# EAGLE board two-layer (EAGLE 5.07), part 1 of 2
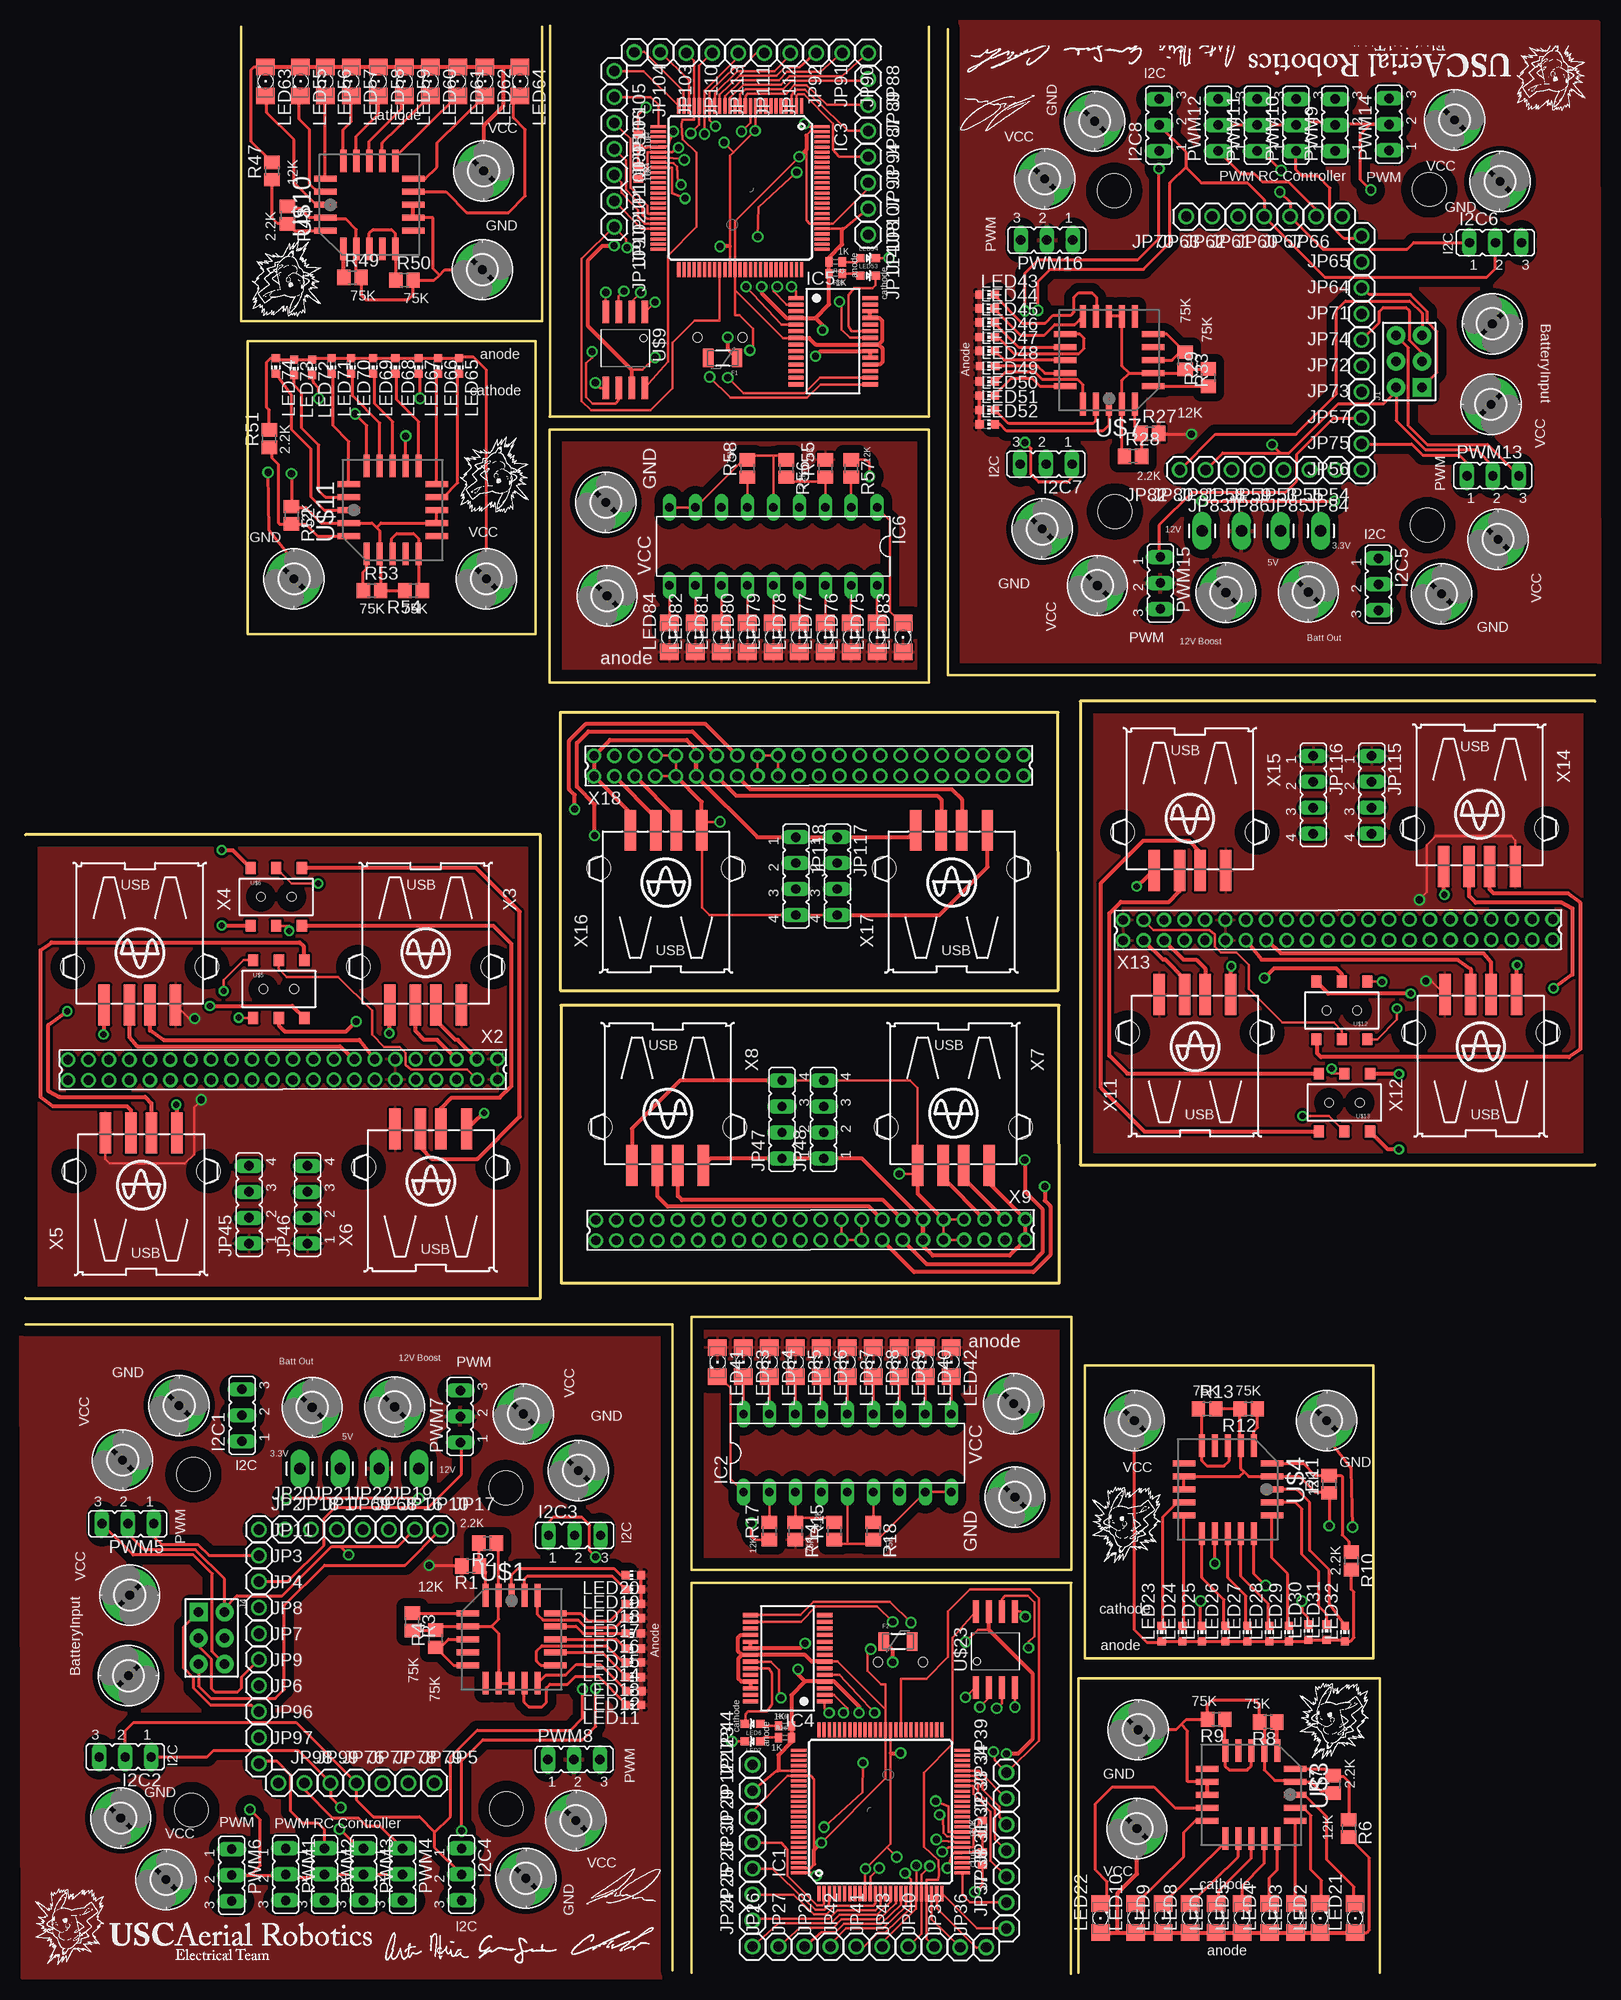
[diagram p0: board, top side]
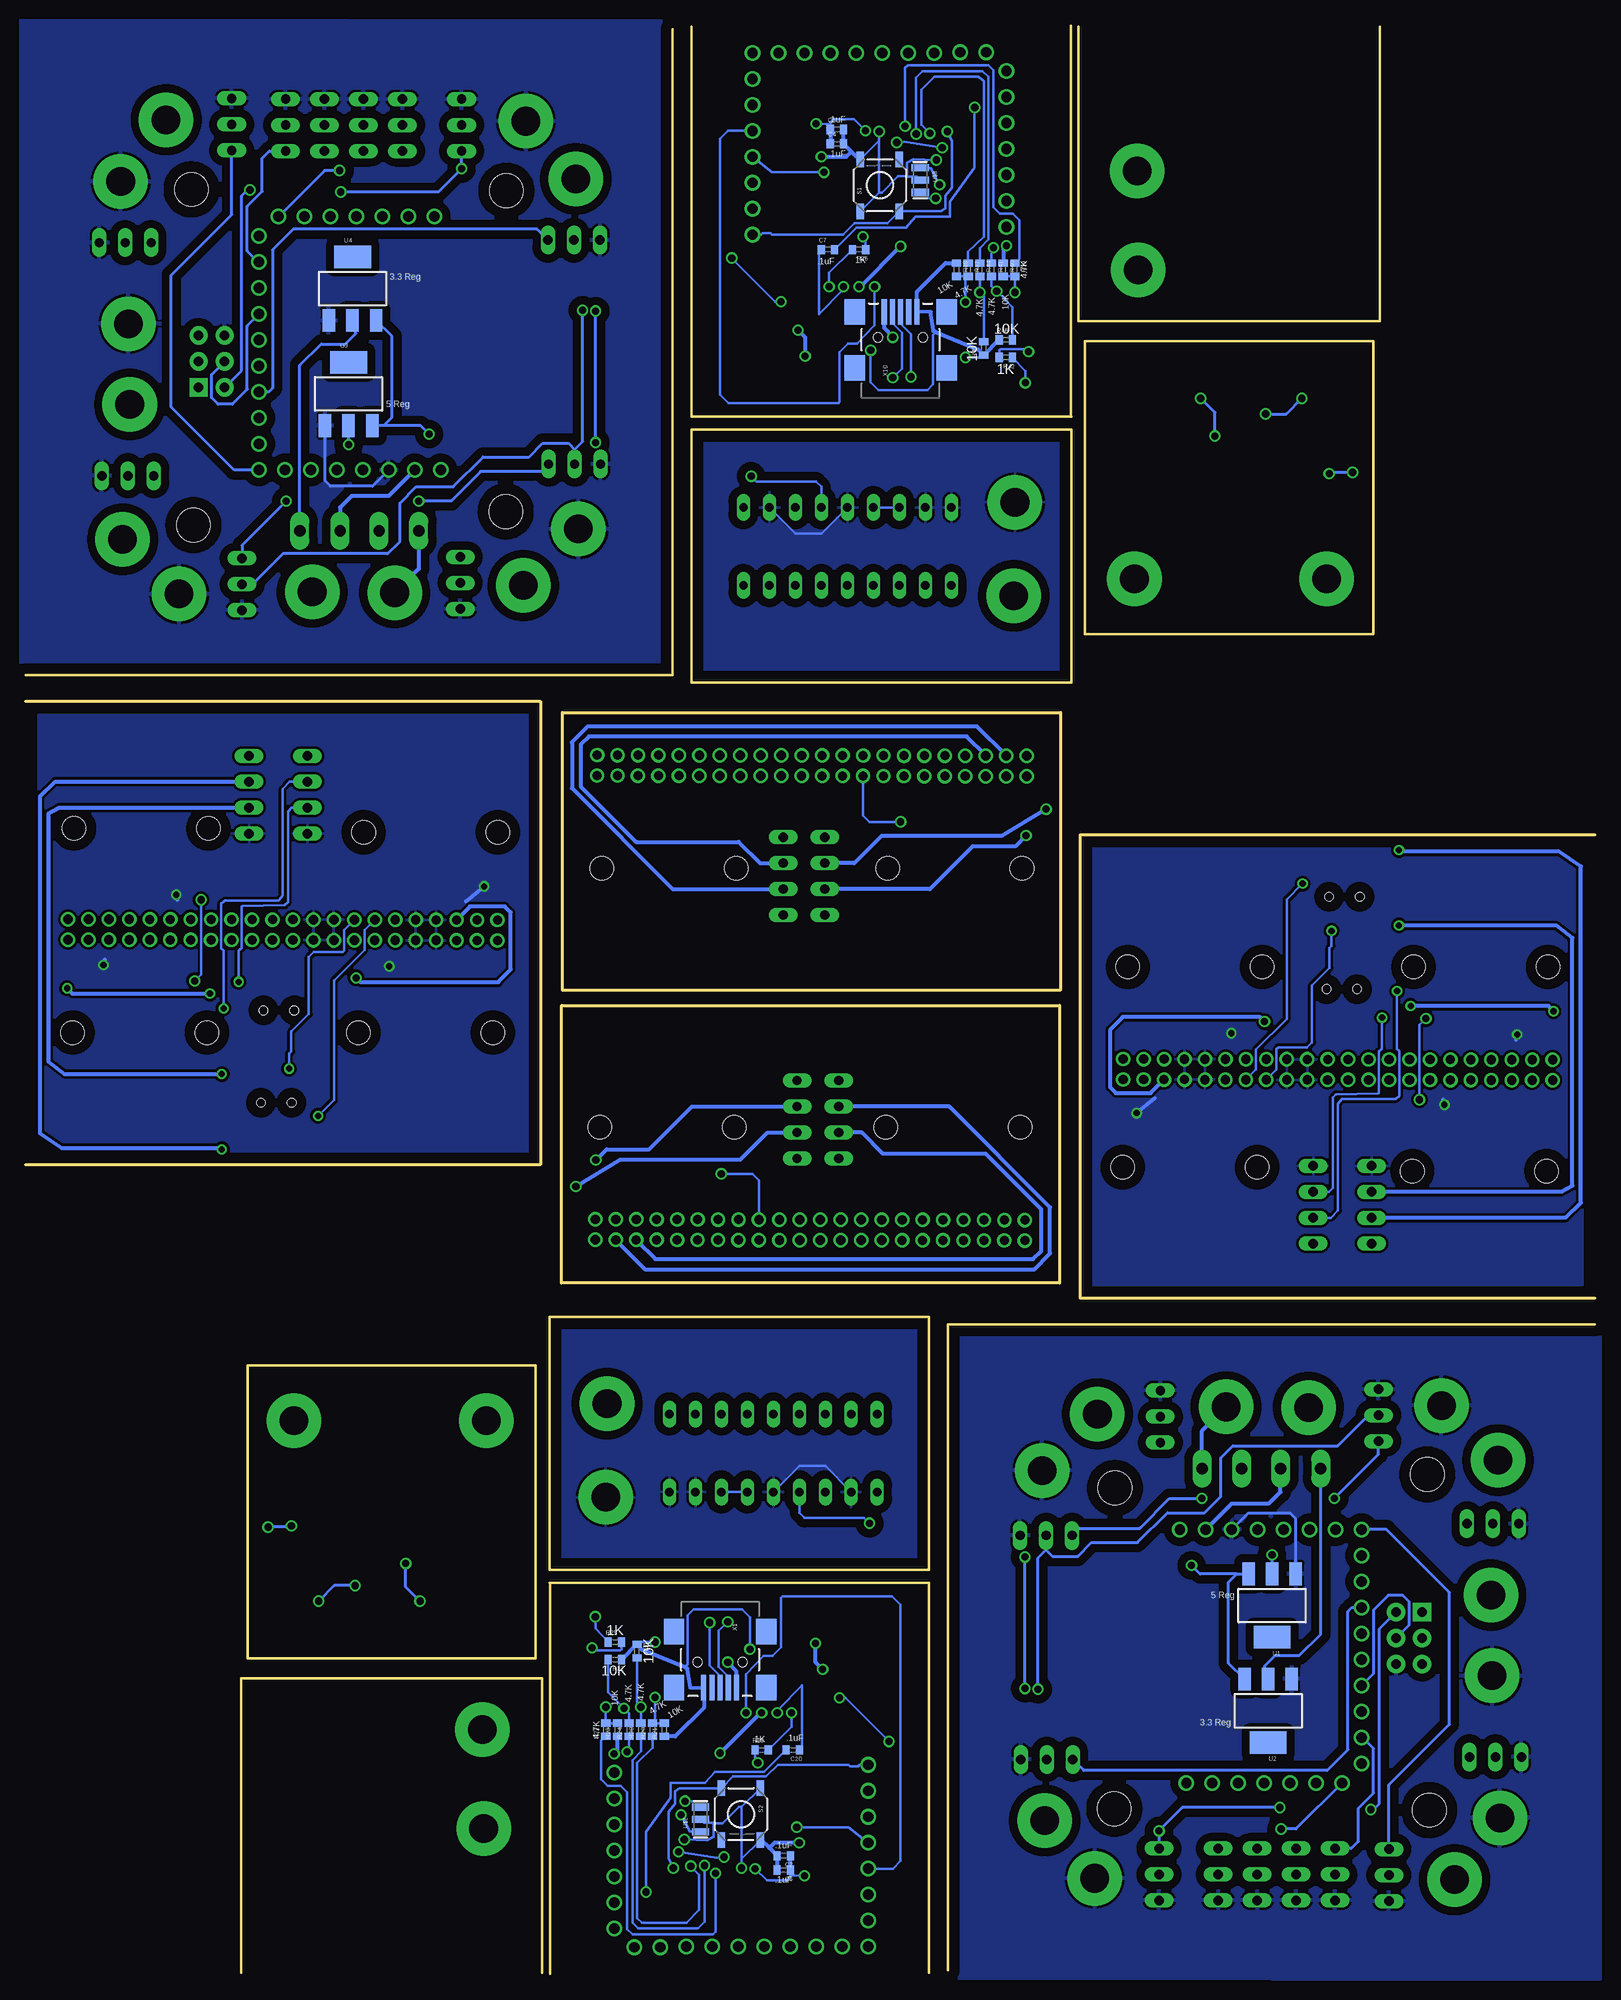
[diagram p1: board, bottom side, seen from below]

Size 153.47 x 190.5 mm. Coordinates in mm from the lower left corner, seen from the top.
Outline: 63.27,0.34 63.27,63.52 0.03,63.52
Outline: 132.4,0.13 132.4,28.88 102.96,28.88 102.96,0.13
Outline: 65.11,38.23 102.25,38.23
Outline: 65.11,38.09 65.11,0.13
Outline: 102.2,38.22 102.2,0
Outline: 0,66.06 50.34,66.06 50.34,111.39 0,111.39
Outline: 90.2,190.16 90.2,126.97 153.44,126.97
Outline: 21.06,190.37 21.06,161.62 50.51,161.62 50.51,190.37
Outline: 88.35,152.27 51.22,152.27
Outline: 88.35,152.41 88.35,190.37
Outline: 51.27,152.28 51.27,190.5
Outline: 153.47,124.44 103.12,124.44 103.12,79.11 153.47,79.11
Outline: 103.59,30.86 131.77,30.86 131.77,59.49 103.59,59.49 103.59,30.86
Outline: 65.11,39.5 102.25,39.5 102.25,64.25 65.11,64.25 65.11,39.5
Outline: 49.87,159.64 21.7,159.64 21.7,131.01 49.87,131.01 49.87,159.64
Outline: 88.35,151 51.22,151 51.22,126.25 88.35,126.25 88.35,151
Outline: 100.96,123.34 52.27,123.34 52.29,96.17 100.98,96.17 100.96,123.34
Outline: 52.37,67.54 101.07,67.54 101.05,94.71 52.36,94.71 52.37,67.54
Copper layers (1*16): Top 0.035mm / dielectric 1.5mm / Bottom 0.035mm
Design rules "default": minimum track width 10mil, minimum drill 24mil, track to track 8mil, track to pad 8mil, pad to pad 8mil, via to via 8mil, smd to smd 8mil, copper to edge 40mil, drill to drill 8mil, minimum pad ring 10mil, minimum via ring 8mil, stop-mask expansion 4mil, vias tented up to drill 0mil, thermal gap 10mil

## Footprints (pad centres in the part's own frame; a part is rotated, then mirrored left to right if it is on the bottom)
C0402 = smd 0.7 x 0.9: 1 -0.65,0; 2 0.65,0
PTC-1206 = smd 1 x 1.8: 1 -1.4,0; 2 1.4,0
2,8-PAD = drill 2.8 pad 5.334 round: B2,8 0,0
JP2 = drill 0.914 long: 1 -2.54,0; 2 0,0; 3 2.54,0
TQFP100 = smd 1.5 x 0.3: 1 -8,6; 2 -8,5.5; 3 -8,5; 4 -8,4.5; 5 -8,4; 6 -8,3.5; 7 -8,3; 8 -8,2.5; 9 -8,2; 10 -8,1.5; 11 -8,1; 12 -8,0.5; 13 -8,0; 14 -8,-0.5; 15 -8,-1; 16 -8,-1.5; 17 -8,-2; 18 -8,-2.5; 19 -8,-3; 20 -8,-3.5; 21 -8,-4; 22 -8,-4.5; 23 -8,-5; 24 -8,-5.5; 25 -8,-6; 51 8,-6; 52 8,-5.5; 53 8,-5; 54 8,-4.5; 55 8,-4; 56 8,-3.5; 57 8,-3; 58 8,-2.5; 59 8,-2; 60 8,-1.5; 61 8,-1; 62 8,-0.5; 63 8,0; 64 8,0.5; 65 8,1; 66 8,1.5; 67 8,2; 68 8,2.5; 69 8,3; 70 8,3.5; 71 8,4; 72 8,4.5; 73 8,5; 74 8,5.5; 75 8,6 | smd 0.3 x 1.5: 26 -6,-8; 27 -5.5,-8; 28 -5,-8; 29 -4.5,-8; 30 -4,-8; 31 -3.5,-8; 32 -3,-8; 33 -2.5,-8; 34 -2,-8; 35 -1.5,-8; 36 -1,-8; 37 -0.5,-8; 38 0,-8; 39 0.5,-8; 40 1,-8; 41 1.5,-8; 42 2,-8; 43 2.5,-8; 44 3,-8; 45 3.5,-8; 46 4,-8; 47 4.5,-8; 48 5,-8; 49 5.5,-8; 50 6,-8; 76 6,8; 77 5.5,8; 78 5,8; 79 4.5,8; 80 4,8; 81 3.5,8; 82 3,8; 83 2.5,8; 84 2,8; 85 1.5,8; 86 1,8; 87 0.5,8; 88 0,8; 89 -0.5,8; 90 -1,8; 91 -1.5,8; 92 -2,8; 93 -2.5,8; 94 -3,8; 95 -3.5,8; 96 -4,8; 97 -4.5,8; 98 -5,8; 99 -5.5,8; 100 -6,8
DIL18 = drill 0.813 long: 1 -10.16,-3.81; 2 -7.62,-3.81; 3 -5.08,-3.81; 4 -2.54,-3.81; 5 0,-3.81; 6 2.54,-3.81; 7 5.08,-3.81; 8 7.62,-3.81; 9 10.16,-3.81; 10 10.16,3.81; 11 7.62,3.81; 12 5.08,3.81; 13 2.54,3.81; 14 0,3.81; 15 -2.54,3.81; 16 -5.08,3.81; 17 -7.62,3.81; 18 -10.16,3.81
SSOP28 = smd 0.4 x 1.5: 1 -4.225,-3.625; 2 -3.575,-3.625; 3 -2.925,-3.625; 4 -2.275,-3.625; 5 -1.625,-3.625; 6 -0.975,-3.625; 7 -0.325,-3.625; 8 0.325,-3.625; 9 0.975,-3.625; 10 1.625,-3.625; 11 2.275,-3.625; 12 2.925,-3.625; 13 3.575,-3.625; 14 4.225,-3.625; 15 4.225,3.625; 16 3.575,3.625; 17 2.925,3.625; 18 2.275,3.625; 19 1.625,3.625; 20 0.975,3.625; 21 0.325,3.625; 22 -0.325,3.625; 23 -0.975,3.625; 24 -1.625,3.625; 25 -2.275,3.625; 26 -2.925,3.625; 27 -3.575,3.625; 28 -4.225,3.625
HEAD3X2 = drill 0.914 pad 1.778 square: 1 0,0 | drill 0.914 pad 1.778 round: 2 0,2.54; 3 2.54,0; 4 2.54,2.54; 5 5.08,0; 6 5.08,2.54
1X01 = drill 1.016 round: 1 0,0
STAND-OFF = hole 3.302: 0,0
1X01_LONGPAD = drill 1.118 pad 1.88 long: 1 0,0
JP4 = drill 0.914 long: 1 -3.81,0; 2 -1.27,0; 3 1.27,0; 4 3.81,0
1206 = smd 1.6 x 1.803: A -1.422,0; C 1.422,0
LED-0603 = smd 0.8 x 0.8: A 0,-0.75; C 0,0.75
CHIP-LED0603 = smd 0.8 x 0.8: A 0,-0.75; C 0,0.75
R0805 = smd 1.3 x 1.5: 1 -0.85,0; 2 0.85,0
TACTILE_SWITCH_SMD = smd 1.524 x 0.762: 1 -2.54,1.905; 2 2.54,1.905; 3 -2.54,-1.905; 4 2.54,-1.905
SOT223 = smd 1.219 x 2.235: 1 -2.311,-3.099; 2 0,-3.099; 3 2.311,-3.099 | smd 3.6 x 2.2: 4 0,3.099
PLCC20S = smd 0.6 x 2.2: 1 0,4.3; 2 -1.27,4.3; 3 -2.54,4.3; 9 -2.54,-4.3; 10 -1.27,-4.3; 11 0,-4.3; 12 1.27,-4.3; 13 2.54,-4.3; 19 2.54,4.3; 20 1.27,4.3 | smd 2.2 x 0.6: 4 -4.3,2.54; 5 -4.3,1.27; 6 -4.3,0; 7 -4.3,-1.27; 8 -4.3,-2.54; 14 4.3,-2.54; 15 4.3,-1.27; 16 4.3,0; 17 4.3,1.27; 18 4.3,2.54
RESONATOR-SMD = smd 0.7 x 1.7: 1 -1.2,0; 2 0,0; 3 1.2,0
AYZ0202 = smd 1 x 1.15: 1 -2.5,2.825; 2 0,2.825; 3 2.5,2.825; 4 -2.5,-2.825; 5 0,-2.825; 6 2.5,-2.825 | hole 0.85: 1.5,0; -1.5,0
SO08WIDE = smd 0.61 x 2.21: 1 -1.905,-3.569; 2 -0.635,-3.569; 3 0.635,-3.569; 4 1.905,-3.569; 5 1.905,3.886; 6 0.635,3.886; 7 -0.635,3.886; 8 -1.905,3.886
USB-MINIB = smd 2.5 x 0.5: D+ 2.5,0; D- 2.5,0.8; GND 2.5,-1.6; ID 2.5,-0.8; VBUS 2.5,1.6 | smd 2.5 x 2: GND@1 -3,-4.5; GND@2 -3,4.5; GND@3 2.5,4.5; GND@4 2.5,-4.5 | hole 0.9: 0,2.2; 0,-2.2
87758-4416 = drill 0.9 pad 1.27 round: 1 -21,-1; 2 -21,1; 3 -19,-1; 4 -19,1; 5 -17,-1; 6 -17,1; 7 -15,-1; 8 -15,1; 9 -13,-1; 10 -13,1; 11 -11,-1; 12 -11,1; 13 -9,-1; 14 -9,1; 15 -7,-1; 16 -7,1; 17 -5,-1; 18 -5,1; 19 -3,-1; 20 -3,1; 21 -1,-1; 22 -1,1; 23 1,-1; 24 1,1; 25 3,-1; 26 3,1; 27 5,-1; 28 5,1; 29 7,-1; 30 7,1; 31 9,-1; 32 9,1; 33 11,-1; 34 11,1; 35 13,-1; 36 13,1; 37 15,-1; 38 15,1; 39 17,-1; 40 17,1; 41 19,-1; 42 19,1; 43 21,-1; 44 21,1
USB-A003 = smd 1.12 x 4: 1 -3.5,14; 2 -1,14; 3 1,14; 4 3.5,14 | hole 2.3: -6.57,10.28; 6.57,10.28

## Placement (x,y rotation side)
C1  .1uF  [C0402]  93.56,11.3 90 top
C2  .1uF  [C0402]  79.34,11.56 180 bottom
C3  .1uF  [C0402]  59.91,179.2 270 top
C4  .1uF  [C0402]  74.13,178.94 0 bottom
C5  .1uF  [C0402]  74.13,180.34 0 bottom
C6  .1uF  [C0402]  79.34,10.16 180 bottom
C7  .1uF or 240 ohms  [C0402]  75.02,168.59 0 bottom
C20  .1uF or 240 ohms  [C0402]  78.45,21.91 180 bottom
F1  PTCSMD  [PTC-1206]  68.16,157.99 180 top
F2  PTCSMD  [PTC-1206]  85.31,32.51 0 top
H1  MOUNT-PAD-ROUND2.8  [2,8-PAD]  10.19,37.03 270 top
H2  MOUNT-PAD-ROUND2.8  [2,8-PAD]  10.06,29.16 270 top
H3  MOUNT-PAD-ROUND2.8  [2,8-PAD]  53.81,15 0 top
H4  MOUNT-PAD-ROUND2.8  [2,8-PAD]  48.92,9.35 0 top
H5  MOUNT-PAD-ROUND2.8  [2,8-PAD]  48.67,54.75 0 top
H6  MOUNT-PAD-ROUND2.8  [2,8-PAD]  54.06,49.23 0 top
H7  MOUNT-PAD-ROUND2.8  [2,8-PAD]  9.49,50.24 0 top
H8  MOUNT-PAD-ROUND2.8  [2,8-PAD]  15.01,55.58 0 top
H9  MOUNT-PAD-ROUND2.8  [2,8-PAD]  13.74,9.22 0 top
H10  MOUNT-PAD-ROUND2.8  [2,8-PAD]  9.3,15.25 0 top
H11  MOUNT-PAD-ROUND2.8  [2,8-PAD]  108.67,14.22 180 top
H12  MOUNT-PAD-ROUND2.8  [2,8-PAD]  108.8,23.88 0 top
H13  MOUNT-PAD-ROUND2.8  [2,8-PAD]  28.03,55.38 0 top
H14  MOUNT-PAD-ROUND2.8  [2,8-PAD]  108.42,54.1 0 top
H15  MOUNT-PAD-ROUND2.8  [2,8-PAD]  36.09,55.45 0 top
H16  MOUNT-PAD-ROUND2.8  [2,8-PAD]  127.22,54.1 0 top
H17  MOUNT-PAD-ROUND2.8  [2,8-PAD]  96.61,55.75 0 top
H18  MOUNT-PAD-ROUND2.8  [2,8-PAD]  96.74,46.61 0 top
H19  MOUNT-PAD-ROUND2.8  [2,8-PAD]  99.66,175.5 180 top
H20  MOUNT-PAD-ROUND2.8  [2,8-PAD]  104.55,181.15 180 top
H21  MOUNT-PAD-ROUND2.8  [2,8-PAD]  143.28,153.47 90 top
H22  MOUNT-PAD-ROUND2.8  [2,8-PAD]  143.41,161.34 90 top
H23  MOUNT-PAD-ROUND2.8  [2,8-PAD]  104.8,135.75 180 top
H24  MOUNT-PAD-ROUND2.8  [2,8-PAD]  99.4,141.27 180 top
H25  MOUNT-PAD-ROUND2.8  [2,8-PAD]  143.98,140.26 180 top
H26  MOUNT-PAD-ROUND2.8  [2,8-PAD]  138.46,134.92 180 top
H27  MOUNT-PAD-ROUND2.8  [2,8-PAD]  139.73,181.28 180 top
H28  MOUNT-PAD-ROUND2.8  [2,8-PAD]  144.17,175.25 180 top
H29  MOUNT-PAD-ROUND2.8  [2,8-PAD]  117.37,135.05 180 top
H30  MOUNT-PAD-ROUND2.8  [2,8-PAD]  125.44,135.12 180 top
H31  MOUNT-PAD-ROUND2.8  [2,8-PAD]  44.79,176.28 0 top
H32  MOUNT-PAD-ROUND2.8  [2,8-PAD]  44.67,166.62 180 top
H33  MOUNT-PAD-ROUND2.8  [2,8-PAD]  45.05,136.4 180 top
H34  MOUNT-PAD-ROUND2.8  [2,8-PAD]  26.25,136.4 180 top
H35  MOUNT-PAD-ROUND2.8  [2,8-PAD]  56.86,134.75 180 top
H36  MOUNT-PAD-ROUND2.8  [2,8-PAD]  56.73,143.89 180 top
I2C1  [JP2]  21.17,54.62 90 top
I2C2  [JP2]  9.74,21.22 180 top
I2C3  [JP2]  53.68,42.88 0 top
I2C4  [JP2]  42.63,9.73 270 top
I2C5  [JP2]  132.3,135.88 270 top
I2C6  [JP2]  143.73,169.28 0 top
I2C7  [JP2]  99.78,147.62 180 top
I2C8  [JP2]  110.83,180.77 90 top
IC1  ATMEGA1280-16AU  [TQFP100]  83.59,15.88 90 top
IC2  LM3914N  [DIL18]  80.35,50.93 0 top
IC3  ATMEGA1280-16AU  [TQFP100]  69.88,174.62 270 top
IC4  FT232RL  [SSOP28]  74.51,30.86 90 top
IC5  FT232RL  [SSOP28]  78.96,159.64 270 top
IC6  LM3914N  [DIL18]  73.11,139.57 180 top
J1  HEAD3X2  [HEAD3X2]  136.55,155.12 90 top
J4  HEAD3X2  [HEAD3X2]  16.92,35.38 270 top
JP1  M01PTH  [1X01]  27.9,43.45 0 top
JP2  M01PTH  [1X01]  22.82,43.45 0 top
JP3  M01PTH  [1X01]  22.82,38.37 0 top
JP4  M01PTH  [1X01]  22.82,35.83 0 top
JP5  M01PTH  [1X01]  39.97,18.68 0 top
JP6  M01PTH  [1X01]  22.82,25.67 0 top
JP7  M01PTH  [1X01]  22.82,30.75 0 top
JP8  M01PTH  [1X01]  22.82,33.29 0 top
JP9  M01PTH  [1X01]  22.82,28.21 0 top
JP10  M01PTH  [1X01]  38.06,43.45 0 top
JP11  M01PTH  [1X01]  22.82,40.91 0 top
JP12  STAND-OFF  [STAND-OFF]  47.02,16.14 0 top
JP13  STAND-OFF  [STAND-OFF]  16.22,16.01 0 top
JP14  STAND-OFF  [STAND-OFF]  46.95,47.51 0 top
JP15  STAND-OFF  [STAND-OFF]  16.41,48.84 0 top
JP16  M01PTH  [1X01]  35.52,43.45 0 top
JP17  M01PTH  [1X01]  40.6,43.45 0 top
JP18  M01PTH  [1X01]  25.36,43.45 0 top
JP19  M01PTH_LONGPAD  [1X01_LONGPAD]  38.44,49.42 180 top
JP20  M01PTH_LONGPAD  [1X01_LONGPAD]  26.82,49.42 180 top
JP21  M01PTH_LONGPAD  [1X01_LONGPAD]  30.76,49.42 180 top
JP22  M01PTH_LONGPAD  [1X01_LONGPAD]  34.57,49.42 180 top
JP23  M01PTH  [1X01]  71.08,7.75 90 top
JP24  M01PTH  [1X01]  71.08,2.67 90 top
JP25  M01PTH  [1X01]  71.08,5.21 90 top
JP26  M01PTH  [1X01]  73.62,2.67 90 top
JP27  M01PTH  [1X01]  76.16,2.67 90 top
JP28  M01PTH  [1X01]  78.7,2.67 90 top
JP29  M01PTH  [1X01]  71.08,12.83 90 top
JP30  M01PTH  [1X01]  71.08,10.29 90 top
JP31  M01PTH  [1X01]  95.91,9.53 90 top
JP32  M01PTH  [1X01]  95.91,12.06 90 top
JP33  M01PTH  [1X01]  95.91,14.61 90 top
JP34  M01PTH  [1X01]  95.91,17.14 90 top
JP35  M01PTH  [1X01]  91.4,2.6 90 top
JP36  M01PTH  [1X01]  93.94,2.6 90 top
JP37  M01PTH  [1X01]  95.91,4.45 90 top
JP38  M01PTH  [1X01]  95.91,6.99 90 top
JP39  M01PTH  [1X01]  95.91,19.68 90 top
JP40  M01PTH  [1X01]  88.86,2.67 90 top
JP41  M01PTH  [1X01]  83.78,2.67 90 top
JP42  M01PTH  [1X01]  81.24,2.67 90 top
JP43  M01PTH  [1X01]  86.32,2.67 90 top
JP44  M01PTH  [1X01]  71.08,20.45 90 top
JP45  [JP4]  21.84,75.21 90 top
JP46  [JP4]  27.56,75.21 90 top
JP47  [JP4]  73.96,83.54 90 top
JP48  [JP4]  78.03,83.54 90 top
JP49  STAND-OFF  [STAND-OFF]  106.45,174.36 180 top
JP50  STAND-OFF  [STAND-OFF]  137.25,174.49 180 top
JP51  STAND-OFF  [STAND-OFF]  106.51,142.99 180 top
JP52  STAND-OFF  [STAND-OFF]  137.06,141.66 180 top
JP53  M01PTH  [1X01]  125.56,147.05 180 top
JP54  M01PTH  [1X01]  130.64,147.05 180 top
JP55  M01PTH  [1X01]  128.1,147.05 180 top
JP56  M01PTH  [1X01]  130.64,149.59 180 top
JP57  M01PTH  [1X01]  130.64,154.67 180 top
JP58  M01PTH  [1X01]  120.48,147.05 180 top
JP59  M01PTH  [1X01]  123.02,147.05 180 top
JP60  M01PTH  [1X01]  123.66,171.82 180 top
JP61  M01PTH  [1X01]  121.12,171.82 180 top
JP62  M01PTH  [1X01]  118.58,171.82 180 top
JP63  M01PTH  [1X01]  116.04,171.82 180 top
JP64  M01PTH  [1X01]  130.64,167.37 180 top
JP65  M01PTH  [1X01]  130.64,169.91 180 top
JP66  M01PTH  [1X01]  128.74,171.82 180 top
JP67  M01PTH  [1X01]  126.2,171.82 180 top
JP68  M01PTH  [1X01]  32.98,43.45 0 top
JP69  M01PTH  [1X01]  30.44,43.45 0 top
JP70  M01PTH  [1X01]  113.5,171.82 180 top
JP71  M01PTH  [1X01]  130.64,164.83 180 top
JP72  M01PTH  [1X01]  130.64,159.75 180 top
JP73  M01PTH  [1X01]  130.64,157.21 180 top
JP74  M01PTH  [1X01]  130.64,162.29 180 top
JP75  M01PTH  [1X01]  130.64,152.13 180 top
JP76  M01PTH  [1X01]  29.81,18.68 0 top
JP77  M01PTH  [1X01]  32.35,18.68 0 top
JP78  M01PTH  [1X01]  34.89,18.68 0 top
JP79  M01PTH  [1X01]  37.43,18.68 0 top
JP80  M01PTH  [1X01]  115.4,147.05 180 top
JP81  M01PTH  [1X01]  117.94,147.05 180 top
JP82  M01PTH  [1X01]  112.86,147.05 180 top
JP83  M01PTH_LONGPAD  [1X01_LONGPAD]  115.02,141.08 0 top
JP84  M01PTH_LONGPAD  [1X01_LONGPAD]  126.64,141.08 0 top
JP85  M01PTH_LONGPAD  [1X01_LONGPAD]  122.71,141.08 0 top
JP86  M01PTH_LONGPAD  [1X01_LONGPAD]  118.9,141.08 0 top
JP87  M01PTH  [1X01]  82.38,182.75 270 top
JP88  M01PTH  [1X01]  82.38,187.83 270 top
JP89  M01PTH  [1X01]  82.38,185.29 270 top
JP90  M01PTH  [1X01]  79.84,187.83 270 top
JP91  M01PTH  [1X01]  77.3,187.83 270 top
JP92  M01PTH  [1X01]  74.76,187.83 270 top
JP93  M01PTH  [1X01]  82.38,177.67 270 top
JP94  M01PTH  [1X01]  82.38,180.21 270 top
JP95  M01PTH  [1X01]  57.56,180.97 270 top
JP96  M01PTH  [1X01]  22.82,23.13 0 top
JP97  M01PTH  [1X01]  22.82,20.59 0 top
JP98  M01PTH  [1X01]  24.73,18.68 0 top
JP99  M01PTH  [1X01]  27.27,18.68 0 top
JP100  M01PTH  [1X01]  57.56,178.44 270 top
JP101  M01PTH  [1X01]  57.56,175.9 270 top
JP102  M01PTH  [1X01]  57.56,173.35 270 top
JP103  M01PTH  [1X01]  62.06,187.9 270 top
JP104  M01PTH  [1X01]  59.52,187.9 270 top
JP105  M01PTH  [1X01]  57.56,186.06 270 top
JP106  M01PTH  [1X01]  57.56,183.51 270 top
JP107  M01PTH  [1X01]  82.38,175.13 270 top
JP108  M01PTH  [1X01]  82.38,172.59 270 top
JP109  M01PTH  [1X01]  57.56,170.81 270 top
JP110  M01PTH  [1X01]  64.6,187.83 270 top
JP111  M01PTH  [1X01]  69.68,187.83 270 top
JP112  M01PTH  [1X01]  72.22,187.83 270 top
JP113  M01PTH  [1X01]  67.14,187.83 270 top
JP114  M01PTH  [1X01]  82.38,170.05 270 top
JP115  [JP4]  131.62,115.29 270 top
JP116  [JP4]  125.91,115.29 270 top
JP117  [JP4]  79.38,107.34 270 top
JP118  [JP4]  75.31,107.34 270 top
JP122  M01PTH  [1X01]  71.08,15.37 90 top
JP123  M01PTH  [1X01]  71.08,17.91 90 top
LED1  [1206]  116.42,5.46 90 top
LED2  [1206]  126.58,5.46 90 top
LED3  [1206]  124.17,5.46 90 top
LED4  [1206]  121.63,5.46 90 top
LED5  [1206]  118.96,5.46 90 top
LED6  ORANGE  [LED-0603]  71.08,24.45 90 top
LED7  ORANGE  [LED-0603]  71.08,22.73 90 top
LED8  [1206]  113.88,5.46 90 top
LED9  [1206]  111.21,5.46 90 top
LED10  [1206]  108.55,5.46 90 top
LED11  [CHIP-LED0603]  59.44,26.3 90 top
LED12  [CHIP-LED0603]  59.46,27.66 90 top
LED13  [CHIP-LED0603]  59.44,29.03 90 top
LED14  [CHIP-LED0603]  59.42,30.48 90 top
LED15  [CHIP-LED0603]  59.42,31.81 90 top
LED16  [CHIP-LED0603]  59.41,33.29 90 top
LED17  [CHIP-LED0603]  59.42,34.8 90 top
LED18  [CHIP-LED0603]  59.42,36.2 90 top
LED19  [CHIP-LED0603]  59.42,37.59 90 top
LED20  [CHIP-LED0603]  59.42,38.99 90 top
LED21  [1206]  130.01,5.46 90 top
LED22  [1206]  105.12,5.46 90 top
LED23  [CHIP-LED0603]  111.09,33.27 0 top
LED24  [CHIP-LED0603]  113.12,33.27 0 top
LED25  [CHIP-LED0603]  115.02,33.27 0 top
LED26  [CHIP-LED0603]  117.31,33.27 0 top
LED27  [CHIP-LED0603]  119.47,33.27 0 top
LED28  [CHIP-LED0603]  121.63,33.27 0 top
LED29  [CHIP-LED0603]  123.53,33.27 0 top
LED30  [CHIP-LED0603]  125.44,33.4 0 top
LED31  [CHIP-LED0603]  127.22,33.4 0 top
LED32  [CHIP-LED0603]  128.99,33.27 0 top
LED33  [1206]  70.19,59.82 270 top
LED34  [1206]  72.73,59.82 270 top
LED35  [1206]  75.27,59.82 270 top
LED36  [1206]  77.81,59.82 270 top
LED37  [1206]  80.35,59.82 270 top
LED38  [1206]  82.89,59.82 270 top
LED39  [1206]  85.43,59.82 270 top
LED40  [1206]  87.97,59.82 270 top
LED41  [1206]  67.65,59.82 270 top
LED42  [1206]  90.51,59.82 270 top
LED43  [CHIP-LED0603]  94.03,164.2 270 top
LED44  [CHIP-LED0603]  94.01,162.84 270 top
LED45  [CHIP-LED0603]  94.03,161.47 270 top
LED46  [CHIP-LED0603]  94.04,160.02 270 top
LED47  [CHIP-LED0603]  94.04,158.69 270 top
LED48  [CHIP-LED0603]  94.06,157.21 270 top
LED49  [CHIP-LED0603]  94.04,155.7 270 top
LED50  [CHIP-LED0603]  94.04,154.31 270 top
LED51  [CHIP-LED0603]  94.04,152.91 270 top
LED52  [CHIP-LED0603]  94.04,151.51 270 top
LED53  ORANGE  [LED-0603]  82.38,166.05 270 top
LED54  ORANGE  [LED-0603]  82.38,167.77 270 top
LED55  [1206]  26.89,185.04 270 top
LED56  [1206]  29.3,185.04 270 top
LED57  [1206]  31.84,185.04 270 top
LED58  [1206]  34.51,185.04 270 top
LED59  [1206]  37.05,185.04 270 top
LED60  [1206]  39.59,185.04 270 top
LED61  [1206]  42.25,185.04 270 top
LED62  [1206]  44.92,185.04 270 top
LED63  [1206]  23.46,185.04 270 top
LED64  [1206]  48.35,185.04 270 top
LED65  [CHIP-LED0603]  42.38,157.23 180 top
LED66  [CHIP-LED0603]  40.35,157.23 180 top
LED67  [CHIP-LED0603]  38.44,157.23 180 top
LED68  [CHIP-LED0603]  36.16,157.23 180 top
LED69  [CHIP-LED0603]  34,157.23 180 top
LED70  [CHIP-LED0603]  31.84,157.23 180 top
LED71  [CHIP-LED0603]  29.93,157.23 180 top
LED72  [CHIP-LED0603]  28.03,157.1 180 top
LED73  [CHIP-LED0603]  26.25,157.1 180 top
LED74  [CHIP-LED0603]  24.47,157.23 180 top
LED75  [1206]  83.27,130.68 90 top
LED76  [1206]  80.73,130.68 90 top
LED77  [1206]  78.19,130.68 90 top
LED78  [1206]  75.65,130.68 90 top
LED79  [1206]  73.11,130.68 90 top
LED80  [1206]  70.57,130.68 90 top
LED81  [1206]  68.03,130.68 90 top
LED82  [1206]  65.49,130.68 90 top
LED83  [1206]  85.81,130.68 90 top
LED84  [1206]  62.95,130.68 90 top
PWM1  [JP2]  25.43,9.73 270 top
PWM2  [JP2]  29.24,9.73 270 top
PWM3  [JP2]  33.05,9.73 270 top
PWM4  [JP2]  36.86,9.73 270 top
PWM5  [JP2]  9.99,44.02 180 top
PWM6  [JP2]  20.15,9.66 270 top
PWM7  [JP2]  42.51,54.5 90 top
PWM8  [JP2]  53.62,20.97 0 top
PWM9  [JP2]  128.04,180.77 90 top
PWM10  [JP2]  124.23,180.77 90 top
PWM11  [JP2]  120.42,180.77 90 top
PWM12  [JP2]  116.61,180.77 90 top
PWM13  [JP2]  143.47,146.48 0 top
PWM14  [JP2]  133.31,180.84 90 top
PWM15  [JP2]  110.96,136 270 top
PWM16  [JP2]  99.85,169.53 180 top
R1  12K  [R0805]  43.52,39.89 180 top
R2  2.2K  [R0805]  45.17,42.11 180 top
R3  75K  [R0805]  37.81,34.43 270 top
R4  75K  [R0805]  40.09,32.78 90 top
R5  10k  [C0402]  93.56,14.35 90 top
R6  12K  [R0805]  129.37,14.22 270 top
R7  2.2K  [R0805]  127.85,18.54 90 top
R8  75K  [R0805]  121.5,24.64 180 top
R9  75K  [R0805]  116.42,24.89 180 top
R10  12K  [R0805]  129.63,40.39 270 top
R11  2.2K  [R0805]  127.47,47.88 90 top
R12  75K  [R0805]  119.6,55.24 180 top
R13  75K  [R0805]  115.53,55.24 0 top
R14  12K  [R0805]  75.27,43.31 270 top
R15  2.2K  [R0805]  79.08,43.31 90 top
R16  1k  [C0402]  74.26,24.26 0 top
R17  75K  [R0805]  72.73,43.31 90 top
R18  75K  [R0805]  82.89,43.31 270 top
R19  1k  [C0402]  81.5,21.91 0 bottom
R20  4.7k  [C0402]  92.16,23.88 90 bottom
R21  10k  [C0402]  91.02,23.88 90 bottom
R22  4.7k  [C0402]  96.74,23.88 90 bottom
R23  10k  [C0402]  95.59,23.88 90 bottom
R24  4.7k  [C0402]  94.45,23.88 90 bottom
R25  1k  [C0402]  95.85,32.45 0 bottom
R26  1k  [C0402]  74.26,23.11 0 top
R27  12K  [R0805]  109.94,150.61 0 top
R28  2.2K  [R0805]  108.29,148.39 0 top
R29  75K  [R0805]  115.66,156.07 90 top
R30  4.7k  [C0402]  93.31,23.88 90 bottom
R31  10k  [C0402]  93.69,31.56 270 bottom
R32  10k  [C0402]  95.85,30.73 180 bottom
R33  75K  [R0805]  113.37,157.72 270 top
R34  10k  [C0402]  59.91,176.15 270 top
R35  1k  [C0402]  79.21,166.24 180 top
R36  1k  [C0402]  71.97,168.59 180 bottom
R37  4.7k  [C0402]  61.3,166.62 270 bottom
R38  10k  [C0402]  62.45,166.62 270 bottom
R39  4.7k  [C0402]  56.73,166.62 270 bottom
R40  10k  [C0402]  57.87,166.62 270 bottom
R41  4.7k  [C0402]  59.02,166.62 270 bottom
R42  1k  [C0402]  57.62,158.05 180 bottom
R43  1k  [C0402]  79.21,167.39 180 top
R44  4.7k  [C0402]  60.16,166.62 270 bottom
R45  10k  [C0402]  59.78,158.94 90 bottom
R46  10k  [C0402]  57.62,159.77 0 bottom
R47  12K  [R0805]  24.09,176.28 90 top
R48  2.2K  [R0805]  25.62,171.96 270 top
R49  75K  [R0805]  31.97,165.86 0 top
R50  75K  [R0805]  37.05,165.61 0 top
R51  12K  [R0805]  23.84,150.11 90 top
R52  2.2K  [R0805]  26,142.62 270 top
R53  75K  [R0805]  33.87,135.25 0 top
R54  75K  [R0805]  37.93,135.25 180 top
R55  12K  [R0805]  78.19,147.19 90 top
R56  2.2K  [R0805]  74.38,147.19 270 top
R57  75K  [R0805]  80.73,147.19 270 top
R58  75K  [R0805]  70.57,147.19 90 top
S1  [TACTILE_SWITCH_SMD]  69.94,174.88 90 bottom
S2  [TACTILE_SWITCH_SMD]  83.53,15.62 270 bottom
U1  V_REG_317SMD  [SOT223]  31.58,36.02 180 bottom
U2  V_REG_317SMD  [SOT223]  31.97,25.73 180 bottom
U3  V_REG_317SMD  [SOT223]  121.88,154.48 0 bottom
U4  V_REG_317SMD  [SOT223]  121.5,164.77 0 bottom
U$1  LM3914SMD  [PLCC20S]  47.52,32.72 0 top
U$2  16MHZ  [RESONATOR-SMD]  87.46,15.11 90 bottom
U$3  LM3914SMD  [PLCC20S]  119.85,17.53 270 top
U$4  LM3914SMD  [PLCC20S]  117.56,47.37 270 top
U$5  AYZ0202  [AYZ0202]  24.77,96.29 0 top
U$6  AYZ0202  [AYZ0202]  24.51,105.31 0 top
U$7  LM3914SMD  [PLCC20S]  105.94,157.78 180 top
U$8  16MHZ  [RESONATOR-SMD]  66,175.39 270 bottom
U$9  DF  [SO08WIDE]  58.64,158.94 180 top
U$10  LM3914SMD  [PLCC20S]  33.62,172.97 90 top
U$11  LM3914SMD  [PLCC20S]  35.9,143.13 90 top
U$12  AYZ0202  [AYZ0202]  128.7,94.21 180 top
U$13  AYZ0202  [AYZ0202]  128.96,85.19 180 top
U$23  DF  [SO08WIDE]  94.83,31.56 0 top
X1  USBSMD  [USB-MINIB]  85.56,30.48 270 bottom
X2  87758-4416  [87758-4416]  25.15,88.42 180.1 top
X3  [USB-A003]  39.12,108.74 180 top
X4  [USB-A003]  11.18,108.74 180 top
X5  [USB-A003]  11.3,68.22 0 top
X6  [USB-A003]  39.62,68.61 0 top
X7  [USB-A003]  90.73,93.07 180 top
X8  [USB-A003]  62.79,93.07 180 top
X9  87758-4416  [87758-4416]  76.76,72.75 180.1 top
X10  USBSMD  [USB-MINIB]  67.91,160.02 90 bottom
X11  [USB-A003]  114.35,81.76 0 top
X12  [USB-A003]  142.29,81.76 0 top
X13  87758-4416  [87758-4416]  128.32,102.08 0.1 top
X14  [USB-A003]  142.16,122.28 180 top
X15  [USB-A003]  113.84,121.89 180 top
X16  [USB-A003]  62.61,97.82 0 top
X17  [USB-A003]  90.55,97.82 0 top
X18  87758-4416  [87758-4416]  76.58,118.14 0.1 top

## Library data of the parts
C1-C7 C20 F1 F2 JP1-JP11 JP16-JP18 JP23-JP44 JP53-JP82 JP87-JP114 JP122 JP123 LED6 LED7 LED53 LED54 R5 R16 R19-R26 R30-R32 R34-R46 U$2 U$8 U$9 U$23 X1 X10 = DIYdrones3
H1-H36 = holes
I2C1-I2C8 JP45-JP48 JP115-JP118 PWM1-PWM16 = jumper
IC1 IC3 = atmel-2010
IC2 IC6 U$1 U$3 U$4 U$7 U$10 U$11 = linear
IC4 IC5 = ftdichip
J1 J4 = MyCON2
JP12-JP15 JP19-JP22 JP49-JP52 JP83-JP86 S1 S2 U1-U4 U$5 U$6 U$12 U$13 = SparkFun
LED1-LED5 LED8-LED52 LED55-LED84 = led
R1-R4 R6-R15 R17 R18 R27-R29 R33 R47-R58 = resistor
X2 X9 X13 X18 = con-molex; MF: MOLEX; MPN: 87758-4416; OC_FARNELL: unknown; OC_NEWARK: 59J1588
X3-X8 X11 X12 X14-X17 = con-yamaichi; OC_FARNELL: unknown; OC_NEWARK: unknown

## Nets
3V1: R42.2 U$9.6
3V3: R25.2 U$23.6
5V: F2.2
5V1: F1.2
#RST: C1.1 C20.2
#RST1: C3.1 C7.2
AREF: IC1.98
AREF1: IC3.98
D+: IC4.15 X1.D+
D+1: IC5.15 X10.D+
D-: IC4.16 X1.D-
D-1: IC5.16 X10.D-
DN1: X2.3 X3.2
DN2: X2.13 X4.2
DN3: U$5.2 X2.4
DN4: U$6.2 X2.14
DN5: X7.2 X9.3
DN6: X8.2 X9.13
DN7: JP48.3 X9.14
DN8: JP47.3 X9.4
DN9: X11.2 X13.3
DN10: X12.2 X13.13
DN11: U$13.2 X13.14
DN12: U$12.2 X13.4
DN13: X16.2 X18.3
DN14: X17.2 X18.13
DN15: JP118.3 X18.14
DN16: JP117.3 X18.4
DP1: X2.5 X3.3
DP2: X2.15 X4.3
DP3: U$5.5 X2.6
DP4: U$6.5 X2.16
DP5: X7.3 X9.5
DP6: X8.3 X9.15
DP7: JP48.2 X9.16
DP8: JP47.2 X9.6
DP9: X11.3 X13.5
DP10: X12.3 X13.15
DP11: U$13.5 X13.16
DP12: U$12.5 X13.6
DP13: X16.3 X18.5
DP14: X17.3 X18.15
DP15: JP118.2 X18.16
DP16: JP117.2 X18.6
DTR: C20.1 IC4.2
DTR1: C7.1 IC5.2
GND: H2.B2,8 H4.B2,8 H6.B2,8 H8.B2,8 H10.B2,8 I2C1.3 I2C2.3 I2C3.3 I2C4.3 J4.6 JP16.1 PWM1.3 PWM2.3 PWM3.3 PWM4.3 PWM5.3 PWM6.3 PWM7.3 PWM8.3 U1.1 U2.1
GND1: C2.2 C6.2 IC1.11 IC1.32 IC1.62 IC1.81 IC1.99 IC4.7 IC4.18 IC4.21 IC4.25 IC4.26 JP122.1 R21.1 R23.1 R31.1 R32.1 S2.1 S2.2 U$2.2 U$23.7 X1.GND
GND2: JP45.4 JP46.4 X2.7 X2.8 X2.9 X2.10 X2.17 X2.18 X2.19 X2.20 X3.4 X4.4 X5.4 X6.4
GND3: JP47.4 JP48.4 X7.4 X8.4 X9.7 X9.8 X9.9 X9.10 X9.17 X9.18 X9.19 X9.20
GND4: H20.B2,8 H22.B2,8 H24.B2,8 H26.B2,8 H28.B2,8 I2C5.3 I2C6.3 I2C7.3 I2C8.3 J1.6 JP81.1 PWM9.3 PWM10.3 PWM11.3 PWM12.3 PWM13.3 PWM14.3 PWM15.3 PWM16.3 U3.1 U4.1
GND5: C4.2 C5.2 IC3.11 IC3.32 IC3.62 IC3.81 IC3.99 IC5.7 IC5.18 IC5.21 IC5.25 IC5.26 JP107.1 R38.1 R40.1 R45.1 R46.1 S1.1 S1.2 U$8.2 U$9.7 X10.GND
GND6: JP115.4 JP116.4 X11.4 X12.4 X13.7 X13.8 X13.9 X13.10 X13.17 X13.18 X13.19 X13.20 X14.4 X15.4
GND7: JP117.4 JP118.4 X16.4 X17.4 X18.7 X18.8 X18.9 X18.10 X18.17 X18.18 X18.19 X18.20
HDN1: JP115.2 U$13.1
HDN2: JP116.2 U$12.1
HDN3: JP46.2 U$5.1
HDN4: JP45.2 U$6.1
HDP1: JP115.3 U$13.4
HDP2: JP116.3 U$12.4
HDP3: JP46.3 U$5.4
HDP4: JP45.3 U$6.4
MOSI/1.1: R37.2 R38.2 U$9.1
MOSI/1.5: R20.2 R21.2 U$23.1
N$1: R1.1 R2.2 U$1.3
N$2: LED11.C U$1.12
N$3: LED12.C U$1.13
N$4: LED14.C U$1.14
N$5: LED13.C U$1.15
N$6: LED6.A R16.1
N$7: LED15.C U$1.16
N$8: LED16.C U$1.17
N$9: LED18.C U$1.18
N$10: LED17.C U$1.19
N$11: LED19.C U$1.20
N$12: LED20.C U$1.1
N$13: R6.1 R7.2 U$3.3
N$14: R3.1 U$1.4
N$15: R4.1 U$1.6 U$1.8
N$16: IC4.1 R19.2
N$17: F2.1 X1.VBUS
N$18: R22.2 R23.2 U$23.4
N$19: R24.2 R32.2 U$23.3
N$20: R9.1 U$3.6 U$3.8
N$21: R8.1 U$3.4
N$22: LED7.A R26.1
N$23: LED22.C U$3.12
N$24: IC4.23 LED6.C
N$25: IC4.22 LED7.C
N$26: LED10.C U$3.13
N$27: LED9.C U$3.14
N$28: LED8.C U$3.15
N$29: LED1.C U$3.16
N$30: LED5.C U$3.17
N$31: LED4.C U$3.18
N$32: LED3.C U$3.19
N$33: LED2.C U$3.20
N$34: LED21.C U$3.1
N$35: R10.1 R11.2 U$4.3
N$36: R13.1 U$4.6 U$4.8
N$37: R12.1 U$4.4
N$38: LED23.C U$4.12
N$39: LED24.C U$4.13
N$40: LED26.C U$4.14
N$41: LED25.C U$4.15
N$42: LED27.C U$4.16
N$43: LED28.C U$4.17
N$44: LED30.C U$4.18
N$45: LED29.C U$4.19
N$46: LED31.C U$4.20
N$47: LED32.C U$4.1
N$48: IC2.3 R14.1 R15.2
N$49: IC2.6 IC2.7 R18.1
N$50: IC2.4 R17.1
N$51: IC2.10 LED42.C
N$52: IC2.11 LED40.C
N$53: IC2.12 LED39.C
N$54: IC2.13 LED38.C
N$55: IC2.14 LED37.C
N$56: IC1.34 U$2.3
N$57: IC2.15 LED36.C
N$58: IC2.16 LED35.C
N$59: IC2.17 LED34.C
N$60: IC2.18 LED33.C
N$61: IC2.1 LED41.C
N$62: R27.1 R28.2 U$7.3
N$63: R33.1 U$7.6 U$7.8
N$64: R29.1 U$7.4
N$65: LED43.C U$7.12
N$66: LED44.C U$7.13
N$67: LED46.C U$7.14
N$68: LED45.C U$7.15
N$69: LED47.C U$7.16
N$70: LED48.C U$7.17
N$71: LED50.C U$7.18
N$72: LED49.C U$7.19
N$73: LED51.C U$7.20
N$74: LED52.C U$7.1
N$75: IC3.34 U$8.3
N$76: IC3.33 U$8.1
N$77: LED53.A R35.1
N$78: IC5.1 R36.2
N$79: R39.2 R40.2 U$9.4
N$80: LED54.A R43.1
N$81: IC5.23 LED53.C
N$82: IC5.22 LED54.C
N$83: R41.2 R46.2 U$9.3
N$84: F1.1 X10.VBUS
N$85: R47.1 R48.2 U$10.3
N$86: R50.1 U$10.6 U$10.8
N$87: R49.1 U$10.4
N$88: LED64.C U$10.12
N$89: IC1.33 U$2.1
N$90: LED62.C U$10.13
N$91: LED61.C U$10.14
N$92: LED60.C U$10.15
N$93: LED59.C U$10.16
N$94: LED58.C U$10.17
N$95: LED57.C U$10.18
N$96: LED56.C U$10.19
N$97: LED55.C U$10.20
N$98: LED63.C U$10.1
N$99: R51.1 R52.2 U$11.3
N$100: R54.1 U$11.6 U$11.8
N$101: R53.1 U$11.4
N$102: LED65.C U$11.12
N$103: LED66.C U$11.13
N$104: LED68.C U$11.14
N$105: LED67.C U$11.15
N$106: LED69.C U$11.16
N$107: LED70.C U$11.17
N$108: LED72.C U$11.18
N$109: LED71.C U$11.19
N$110: LED73.C U$11.20
N$111: LED74.C U$11.1
N$112: IC6.3 R55.1 R56.2
N$113: IC6.6 IC6.7 R58.1
N$114: IC6.4 R57.1
N$115: IC6.10 LED84.C
N$116: IC6.11 LED82.C
N$117: IC6.12 LED81.C
N$118: IC6.13 LED80.C
N$119: IC6.14 LED79.C
N$120: IC6.15 LED78.C
N$121: IC6.16 LED77.C
N$122: IC6.17 LED76.C
N$123: IC6.18 LED75.C
N$124: IC6.1 LED83.C
PB0: JP8.1
PB1: J4.3 JP7.1
PB2: J4.4 JP9.1
PB3: J4.1 JP6.1
PB4: JP96.1 PWM1.1
PB5: JP97.1 PWM2.1
PB6: JP98.1 PWM3.1
PB7: JP99.1 PWM4.1
PB8: IC1.26 JP38.1
PB9: IC1.23 JP35.1
PB10: IC1.24 JP36.1
PB11: IC1.25 JP37.1
PB12: IC1.19 JP42.1 R22.1
PB13: IC1.20 JP41.1 R30.1
PB14: IC1.21 JP43.1 R20.1
PB15: IC1.22 JP40.1 U$23.8
PB16: JP67.1 PWM12.1
PB17: JP64.1 PWM9.1
PB18: JP65.1 PWM10.1
PB19: JP66.1 PWM11.1
PB20: J1.1 JP71.1
PB21: J1.4 JP74.1
PB22: J1.3 JP72.1
PB23: JP73.1
PB24: IC3.26 JP106.1
PB25: IC3.23 JP103.1
PB26: IC3.24 JP104.1
PB27: IC3.25 JP105.1
PB28: IC3.19 JP112.1 R39.1
PB29: IC3.20 JP111.1 R44.1
PB30: IC3.21 JP113.1 R37.1
PB31: IC3.22 JP110.1 U$9.8
PC1: IC1.59 JP39.1 R24.1
PC2: JP70.1
PC3: IC3.59 JP109.1 R41.1
PC6: JP5.1
PD0: I2C1.1 I2C2.1 I2C3.1 I2C4.1 JP76.1
PD1: I2C1.2 I2C2.2 I2C3.2 I2C4.2 JP77.1
PD2: JP78.1
PD3: JP79.1
PD4: IC1.46 JP34.1
PD5: IC1.45 JP33.1
PD6: IC1.44 JP32.1
PD7: IC1.43 JP31.1
PD8: I2C5.1 I2C6.1 I2C7.1 I2C8.1 JP60.1
PD9: I2C5.2 I2C6.2 I2C7.2 I2C8.2 JP61.1
PD10: JP63.1
PD11: JP62.1
PD12: IC3.46 JP102.1
PD13: IC3.45 JP101.1
PD14: IC3.44 JP100.1
PD15: IC3.43 JP95.1
PE: R2.1 R3.2 R4.2 U$1.2 U$1.5 U$1.10 U$1.11
PE0: JP68.1
PE1: JP69.1
PE2: IC1.3 IC4.5 JP30.1
PE3: IC1.2 JP29.1 R19.1
PE4: H12.B2,8 R7.1 R8.2 R9.2 U$3.2 U$3.5 U$3.10 U$3.11
PE5: H16.B2,8 R11.1 R12.2 R13.2 U$4.2 U$4.5 U$4.10 U$4.11
PE6: H18.B2,8 IC2.2 IC2.5 IC2.8 IC2.9 R15.1 R17.2 R18.2
PE7: R28.1 R29.2 R33.2 U$7.2 U$7.5 U$7.10 U$7.11
PE8: JP59.1
PE9: JP58.1
PE10: IC3.3 IC5.5 JP94.1
PE11: IC3.2 JP93.1 R36.1
PE12: H32.B2,8 R48.1 R49.2 R50.2 U$10.2 U$10.5 U$10.10 U$10.11
PE13: H34.B2,8 R52.1 R53.2 R54.2 U$11.2 U$11.5 U$11.10 U$11.11
PE14: H36.B2,8 IC6.2 IC6.5 IC6.8 IC6.9 R56.1 R57.2 R58.2
PH0: JP1.1
PH1: JP18.1
PH2: IC1.18 JP28.1
PH3: JP2.1 PWM6.1
PH4: JP11.1 PWM5.1
PH5: JP3.1 PWM7.1
PH6: JP4.1 PWM8.1
PH7: IC1.17 JP27.1
PH8: IC1.16 JP26.1
PH9: IC1.15 JP24.1
PH10: IC1.13 JP25.1
PH11: IC1.12 JP23.1
PH12: JP57.1 PWM16.1
PH13: JP56.1 PWM13.1
PH14: JP54.1 PWM14.1
PH15: JP55.1
PH16: JP53.1
PH17: JP75.1 PWM15.1
PH18: IC3.18 JP92.1
PH19: IC3.17 JP91.1
PH20: IC3.16 JP90.1
PH21: IC3.15 JP88.1
PH22: IC3.13 JP89.1
PH23: IC3.12 JP87.1
RESET: J4.5 JP17.1
RESET1: J1.5 JP82.1
RST: C1.2 IC1.30 JP44.1 R5.1 S2.3
RST1: C3.2 IC3.30 JP114.1 R34.1 S1.3
SCK/1.1: R44.2 R45.2 U$9.2
SCK/1.5: R30.2 R31.2 U$23.2
UDN1: U$12.3 X14.2
UDN2: U$13.3 X15.2
UDN3: U$5.3 X5.2
UDN4: U$6.3 X6.2
UDP1: U$12.6 X14.3
UDP2: U$13.6 X15.3
UDP3: U$5.6 X5.3
UDP4: U$6.6 X6.3
VCC: H1.B2,8 H3.B2,8 H5.B2,8 H7.B2,8 H9.B2,8 H13.B2,8 JP22.1 LED11.A LED12.A LED13.A LED14.A LED15.A LED16.A LED17.A LED18.A LED19.A LED20.A PWM7.2 PWM8.2 R1.2 U1.3 U2.3
VCC1: C2.1 C6.1 IC1.10 IC1.31 IC1.61 IC1.80 IC1.100 IC4.4 IC4.19 IC4.20 JP123.1 R5.2 R16.2 R26.2
VCC2: H11.B2,8 LED1.A LED2.A LED3.A LED4.A LED5.A LED8.A LED9.A LED10.A LED21.A LED22.A R6.2
VCC3: H14.B2,8 LED23.A LED24.A LED25.A LED26.A LED27.A LED28.A LED29.A LED30.A LED31.A LED32.A R10.2
VCC4: H17.B2,8 LED33.A LED34.A LED35.A LED36.A LED37.A LED38.A LED39.A LED40.A LED41.A LED42.A R14.2
VCC5: H19.B2,8 H21.B2,8 H23.B2,8 H25.B2,8 H27.B2,8 H30.B2,8 JP86.1 LED43.A LED44.A LED45.A LED46.A LED47.A LED48.A LED49.A LED50.A LED51.A LED52.A PWM15.2 PWM16.2 R27.2 U3.3 U4.3
VCC6: C4.1 C5.1 IC3.10 IC3.31 IC3.61 IC3.80 IC3.100 IC5.4 IC5.19 IC5.20 JP108.1 R34.2 R35.2 R43.2
VCC7: H31.B2,8 LED55.A LED56.A LED57.A LED58.A LED59.A LED60.A LED61.A LED62.A LED63.A LED64.A R47.2
VCC8: H33.B2,8 LED65.A LED66.A LED67.A LED68.A LED69.A LED70.A LED71.A LED72.A LED73.A LED74.A R51.2
VCC9: H35.B2,8 LED75.A LED76.A LED77.A LED78.A LED79.A LED80.A LED81.A LED82.A LED83.A LED84.A R55.2
VCC_3V1: JP84.1 U4.2
VCC_3V3: JP20.1 U2.2
VCC_5V: J4.2 JP10.1 JP21.1 PWM1.2 PWM2.2 PWM3.2 PWM4.2 PWM5.2 PWM6.2 U1.2
VCC_5V1: J1.2 JP80.1 JP85.1 PWM9.2 PWM10.2 PWM11.2 PWM12.2 PWM13.2 PWM14.2 U3.2
VCC_12V: H15.B2,8 JP19.1
VCC_12V1: H29.B2,8 JP83.1
VDD: JP45.1 JP46.1 X2.1 X2.2 X2.11 X2.12 X3.1 X4.1 X5.1 X6.1
VDD1: JP47.1 JP48.1 X7.1 X8.1 X9.1 X9.2 X9.11 X9.12
VDD2: JP115.1 JP116.1 X11.1 X12.1 X13.1 X13.2 X13.11 X13.12 X14.1 X15.1
VDD3: JP117.1 JP118.1 X16.1 X17.1 X18.1 X18.2 X18.11 X18.12
WP: R25.1 U$23.5
WP1: R42.1 U$9.5